# Altium PCB Acoustics_Preamp.PcbDoc
Units mil, origin at the board's own origin, x right, y up, seen from the top; angles counter-clockwise.
Board outline 550 x 1310 mil, 2 copper layers (Top Layer, Bottom Layer), stack 60.992 mil thick; 15 components, 9 nets, 40 pads, 28 vias.
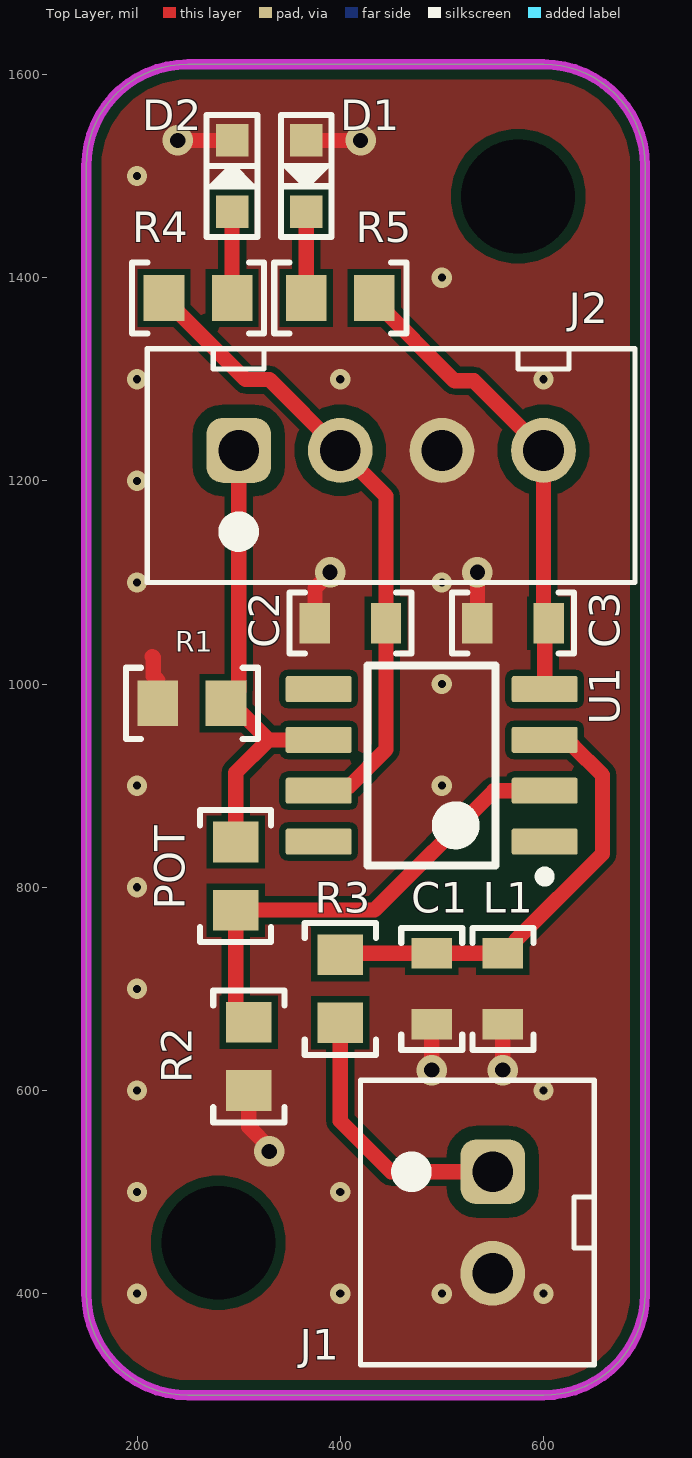
[diagram p0: Top Layer view]
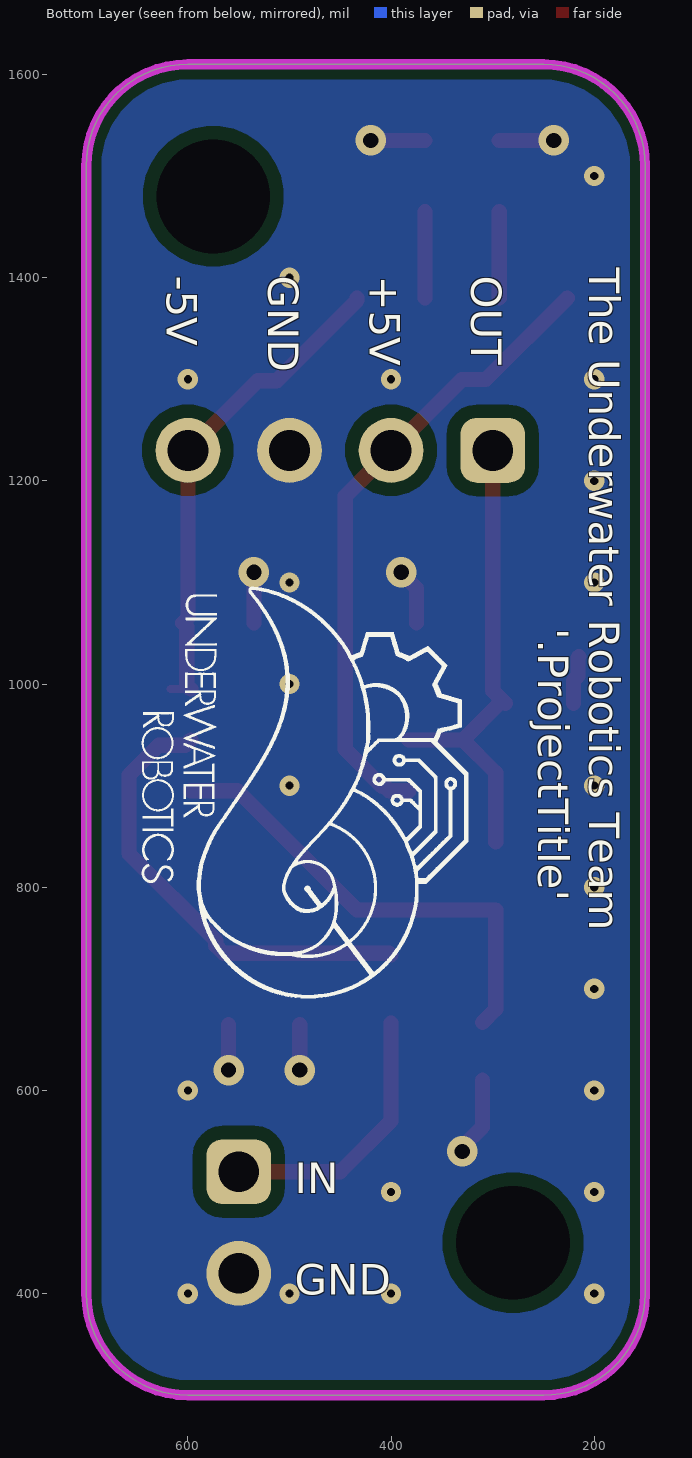
[diagram p1: Bottom Layer view, seen from below]
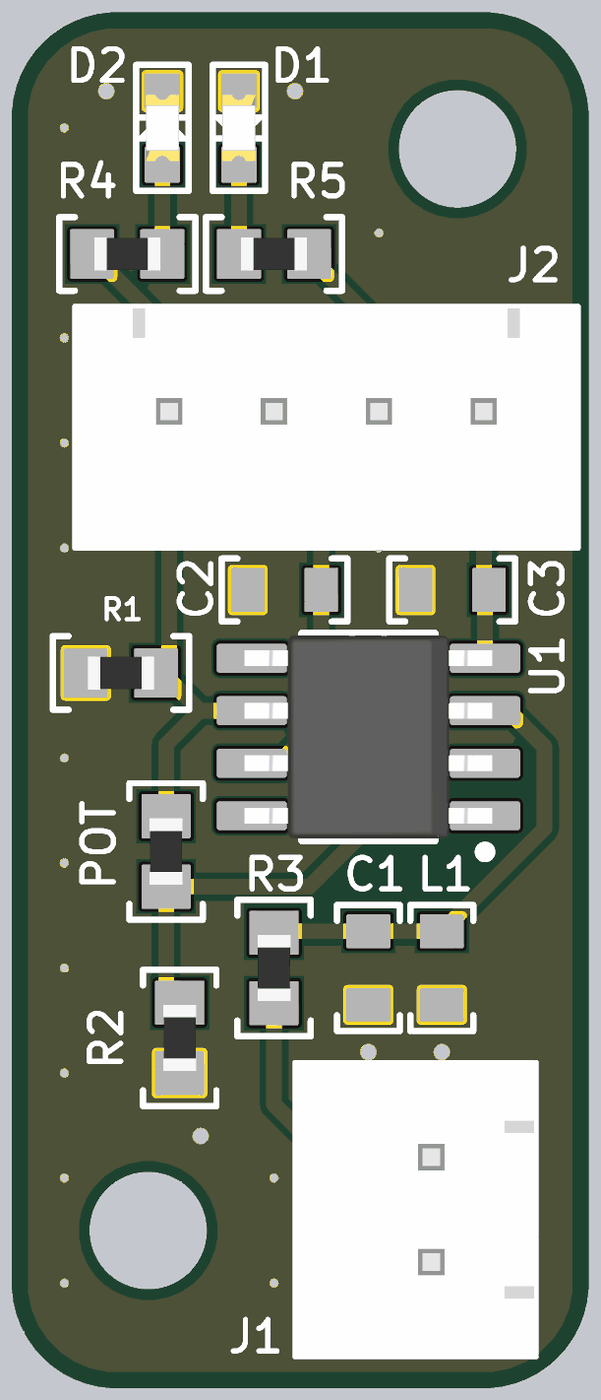
[diagram p2: 3D render of the assembled board from above, using the file's embedded part models]

## Layer stack, top to bottom
Top Solder: solder mask 1, SM-001, Dk 4
Top Layer: signal copper 1.378
Dielectric 3: core 58.236, Core-039, Dk 4.8
Bottom Layer: signal copper 1.378
Bottom Solder: solder mask 1, SM-001, Dk 4

## Board outline
150,400 150,1510 cw(c250,1510) 250,1610 600,1610 cw(c600,1510) 700,1510 700,400 cw(c600,400) 600,300 250,300 cw(c250,400)

## Design rules (kind name [scope] priority, off if disabled: settings)
AcuteAngle [All] p1: minimum=7.50000000000000E+0001 checktracksonly=FALSE
BoardOutlineClearance [(Not OnSilkscreen) Or (Not IsComponentPrimitive)] p1: gap=15 ignorepadtopadclearanceinfootprint=FALSE
Clearance "Clearance JLCPCB" [All] p1: gap=6 ignorepadtopadclearanceinfootprint=FALSE except(5: SMDPad-SMDPad; 10: Arc-Via Arc-Hole Track-Via Track-Hole Via-Via Via-Fill Via-Poly Via-Region Fill-Hole Poly-Hole Region-Hole; 13: Arc-THPad Track-THPad THPad-Fill THPad-Poly THPad-Region; 20: THPad-THPad)
ComponentOrientations [All] p1: allowedrotations=32
DiffPairsRouting CAN [All] p1: maxlimit=8 minlimit=8 mostfreqgap=8 toplayer_minwidth=8 toplayer_maxwidth=8 toplayer_prefwidth=8 bottomlayer_minwidth=8 bottomlayer_maxwidth=8 bottomlayer_prefwidth=8 impedanceprofiledriven=TRUE maxuncoupledlength=500
DiffPairsRouting "USB 2.0" [InDifferentialPairClass('USB 2.0')] p2: maxlimit=6 minlimit=6 mostfreqgap=6 toplayer_minwidth=15 toplayer_maxwidth=15 toplayer_prefwidth=15 bottomlayer_minwidth=15 bottomlayer_maxwidth=15 bottomlayer_prefwidth=15 maxuncoupledlength=500
DiffPairsRouting ETH [All] p3 off: maxlimit=4 minlimit=4 mostfreqgap=4 toplayer_minwidth=8 toplayer_maxwidth=8 toplayer_prefwidth=8 bottomlayer_minwidth=8 bottomlayer_maxwidth=8 bottomlayer_prefwidth=8 impedanceprofiledriven=TRUE maxuncoupledlength=500
FanoutControl Fanout_Default [All] p5: bgadir=Out bgaviamode=Centered fanoutstyle=Auto fanoutdirection=OutOnly viagrid=1 // Fanout_Default (Default Rule)
HoleSize "HoleSize JLCPCB" [All] p1: absolutevalues=TRUE maxlimit=245 minlimit=8 maxpercent=80.000 minpercent=20.000
HoleToHoleClearance "HoleToHoleClearance JLCPCB" [All] p1: gap=20 allowstackedmicrovias=TRUE
MinimumAnnularRing "MinimumAnnularRing JLCPCB" [All] p1: minimumring=6
MinimumSolderMaskSliver "MinimumSolderMaskSliver JLCPCB" [All] p1: minsoldermaskwidth=10
PasteMaskExpansion [All] p1: expansion=1
PolygonConnect [All] p1: connectstyle=Direct reliefconductorwidth=10 reliefentries=4 polygonreliefangle="90 Angle" airgapwidth=10
RoutingVias "RoutingVias JLCPCB" [All] p1: holewidth=10 width=22 viastyle="Through Hole" minholewidth=8 minwidth=20 maxholewidth=28 maxwidth=40
SMDToCorner [All] p1: distance=0
SMDToPlane [All] p1: distance=0
SilkToSilkClearance "SilkToSilkClearance JLCPCB" [All] p1: silktosilkclearance=3
SilkToSolderMaskClearance "SilkToSolderMaskClearance JLCPCB" [IsPad] p1: minsilkscreentomaskgap=6 clearancetoexposedcopper=TRUE
SolderMaskExpansion [All] p1: expansion=4 istentingtop=FALSE
SupplyNets "Schematic Supply Nets_2" [InNet('15V')] p1: voltage=0.000
SupplyNets "Schematic Supply Nets_1" [InNet('GND')] p2: voltage=0.000
SupplyNets "Schematic Supply Nets" [InNet('-15V')] p3: voltage=0.000
UnRoutedNet [All] p1: checkbadconnections=TRUE
Width "Width JLCPCB" [All] p1: maxlimit=100 minlimit=6 preferedwidth=10
21 further rules are at their usual default settings.

## Components (designator, comment, footprint, x,y, rotation, side; value= is the part's Value field where it differs from the comment)
C1 "22uF Ceramic" CAPACITOR_0603 490,700 r270 top value=2.2uF
C2 "100nF Ceramic 25V" CAPACITOR_0603 410,1060 r180 top value=0.1uF
C3 "100nF Ceramic 25V" CAPACITOR_0603 570,1060 r180 top value=0.1uF
D1 "150060GS75000" LED_0603 366.5,1500 r270 top
D2 "150060GS75000" LED_0603 293.5,1500 r90 top
J1 "XH2.54 VERT" CONN_JST_XH254_2POS_VERT 550,520 r270 top
J2 "XH2.54 VERT" CONN_JST_XH254_4POS_VERT 300,1230 r0 top
L1 "FIXED IND 12UH 10MA 1.8 OHM SMD" INDUCTOR_0603 560,700 r270 top value=12uH
POT "15k Ohm 5% 1/10W" RESISTOR_0603 297,811 r90 top
R1 "27 Ohm 5% 1/8W" RESISTOR_0603 254,981 r180 top
R2 "1k Ohm 5% 1/8W" RESISTOR_0603 310,633.5 r270 top
R3 "0.2 Ohm 5% 1/8W" RESISTOR_0603 400,700 r270 top
R4 "RC0603JR-1347KL" RESISTOR_0603 260,1380 r180 top
R5 "RC0603JR-1347KL" RESISTOR_0603 400,1380 r0 top
U1 "OPA228U" D0008A_M 490,920 r180 top

## Footprints (in the part's own frame and the unit in brackets; to place one, negate y for a bottom-side part, rotate by r counter-clockwise, add the part's x,y. Pads: shape width x height; smd on the part's side, far side on the other; paste and mask are expansions set on the pad)
CAPACITOR_0603 [mil] "CAPACITOR 0603"
  rect 30x40 smd: 1(-35,0) 2(35,0)
  silkscreen extent -60,-30 60,30, body extent -31,-16 32,16, height 31
CONN_JST_XH254_2POS_VERT [mm] "JST XH 2.54mm Pitch 2 Pos Vertical"
  rrect50% 1.62x1.62 hole 1.02: 1(0,0)
  round 1.62 hole 1.02: 2(2.54,0)
  silkscreen extent -2.29,-3.3 4.83,2.54, body extent -2.34,-3.35 4.88,2.49, height 7.21
CONN_JST_XH254_4POS_VERT [mm] "JST XH 2.54mm Pitch 4 Pos Vertical"
  rrect50% 1.62x1.62 hole 1.02: 1(0,0)
  round 1.62 hole 1.02: 2(2.54,0) 3(5.08,0) 4(7.62,0)
  silkscreen extent -2.29,-3.3 9.91,2.54, body extent -2.34,-3.35 9.96,2.49, height 7.21
D0008A_M [mm] "SOIC, 8-Leads, Body 5x4mm, Pitch 1.27mm, IPC Low Density"
  rrect15% 1.65x0.65 smd: 1(-2.825,1.905) 2(-2.825,0.635) 3(-2.825,-0.635) 4(-2.825,-1.905) 5(2.825,-1.905) 6(2.825,-0.635) 7(2.825,0.635) 8(2.825,1.905)
  silkscreen extent -2.95,-2.5 1.6,2.9, body extent -3,-2.45 3,2.45, height 1.63
INDUCTOR_0603 [mil] "INDUCTOR 0603"
  rect 30x40 smd: 1(-35,0) 2(35,0)
  silkscreen extent -60,-30 60,30, body extent -31,-16 32,16, height 31
LED_0603 [mil] "LED 0603"
  rect 32x32 smd: 1(-35,0) 2(35,0)
  silkscreen extent -60,-25 60,25, body extent -31,-16 32,16, height 28
RESISTOR_0603 [mil] "Resistor 0603"
  rect 40x45 smd: 1(-33.5,0) 2(33.5,0)
  silkscreen extent -65,-35 65,35, body extent -31,-16 32,16, height 16

## Part data
C1: library part CAPACITOR_22uF_0603, "CAP CER 2.2PF 50V C0G/NP0 0603", Supplier Part Number 1=445-8028-1-ND, Tolerance="+/- 20%", Voltage=6.3V, Made By="Flip B", Supplier 1=Digi-Key
C2 C3: library part CAPACITOR_0.1uF_0603_25V, "Cap 100nF 25V +/-10% / Ceramic 0603", Supplier Part Number 1=1276-1006-1-ND, Tolerance="+/- 10%", Voltage=6.3V, ComponentLink1Description=Datsheet, ComponentLink1URL=https://www.mouser.com/datasheet/2/212/KEM_C1002_X7R_SMD-1102033.pdf, Made By="Flip B", Supplier 1=Digikey
D1 D2: library part LED_Green_0603_3.2V, "LED Green Vf= 3.2V If = 0.025A / 150060GS75000", Color=Green, Forward Current=25mA, Forward Voltage=3.2V, Package=0603, Supplier Part Number 1=732-4971-1-ND, ComponentLink1Description=Datasheet, ComponentLink1URL=https://www.we-online.de/katalog/datasheet/150060GS75000.pdf, Made By="Flip B", Supplier 1=Digi-Key
J1: library part CONN_JST_XH254_2POS_VERT, "JST XH 2.54mm Pitch 2 Pos Vertical", Color=White, Current Per Pin=4A, Manufacturer=JST, ComponentLink1Description="Purchase Link", ComponentLink1URL=https://www.amazon.com/460PCS-XH2-54-Connector-Terminal-Connectors/dp/B09DBGVX5C, Configuration=Vertical, Created By="Robert P", NOTE="Do not use JST 2.5mm parts with this footprint. JST does not make 2.54mm pitch pins, rather only clones make this connector!", Number of Positions=2, Pitch=2.54mm, Series="XH 2.54"
J2: library part CONN_JST_XH254_4POS_VERT, "JST XH 2.54mm Pitch 4 Pos Vertical", Color=White, Current Per Pin=4A, Manufacturer=JST, ComponentLink1Description="Purchase Link", ComponentLink1URL=https://www.amazon.com/460PCS-XH2-54-Connector-Terminal-Connectors/dp/B09DBGVX5C, Configuration=Vertical, Created By="Robert P", NOTE="Do not use JST 2.5mm parts with this footprint. JST does not make 2.54mm pitch pins, rather only clones make this connector!", Number of Positions=4, Pitch=2.54mm, Series="XH 2.54"
L1: library part INDUCTOR_12uH_0603, "12 µH Shielded Multilayer Inductor 10 mA 1.8Ohm Max 0603 (1608 Metric)", Current Rating=2.1A, DC Resistance=36mOhm, Supplier Part Number 1=MLF1608E120JTD25, Tolerance="+/- 20%", Made By="Robert Pafford", Supplier 1="Arrow Electronics"
POT: library part RESISTOR_15K_0603, "RES 15k OHM 5% 1/10W 0603", Digikey Part Numer=CR0603-JW-104ELFTR-ND, Supplier Part Number 1=RMCF0603JG15K0, Tolerance="+/- 5%", Value  (Ohms)=15K, ComponentLink1Description=Datasheet, ComponentLink1URL=https://www.bourns.com/docs/product-datasheets/CRxxxxx.pdf, Made By="Dylan Trainor", Supplier=Digikey, Supplier 1=Avnet, Wattage=1/8W
R1: library part RESISTOR_27_0603, "RES 27 OHM 5% 1/8W 0603", Digikey Part Numer=CR0603-JW-104ELFTR-ND, Supplier Part Number 1=2019-RK73B1JTTD270JCT-ND, Tolerance="+/- 5%", Value  (Ohms)=27, ComponentLink1Description=Datasheet, ComponentLink1URL=https://www.bourns.com/docs/product-datasheets/CRxxxxx.pdf, Made By="Robert Pafford", Supplier=Digikey, Supplier 1=Digi-Key, Wattage=1/8W
R2: library part RESISTOR_1K_0603, "RES 1.8 OHM 5% 1/8W 0603", Digikey Part Numer=CR0603-JW-104ELFTR-ND, Supplier Part Number 1=2019-RK73B1JTTD102JCT-ND, Tolerance="+/- 5%", Value  (Ohms)=1K, ComponentLink1Description=Datasheet, ComponentLink1URL=https://www.bourns.com/docs/product-datasheets/CRxxxxx.pdf, Made By="Robert Pafford", Supplier=Digikey, Supplier 1=Digi-Key, Wattage=1/8W
R3: library part RESISTOR_0.2_0603, "RES 0.2 OHM 5% 1/8W 0603", Digikey Part Numer=CR0603-JW-104ELFTR-ND, Supplier Part Number 1=279-RLP73N1JR20JTD, Tolerance="+/- 5%", Value  (Ohms)=0.2, ComponentLink1Description=Datasheet, ComponentLink1URL=https://www.bourns.com/docs/product-datasheets/CRxxxxx.pdf, Made By="Robert Pafford", Supplier=Digikey, Supplier 1=Mouser, Wattage=1/8W
R4 R5: "47kohm 0603 1/10w", Mfr_Name=Yageo, Supplier Part Number 1=603-RC0603JR-1347KL, Copyright="Copyright (C) 2024 Ultra Librarian. All rights reserved.", Manufacturer_Part_Number=RC0603JR-1347KL, RefDes=RefDes, Supplier 1=Mouser, Type=DEV
U1: library part CMP-0272-00518-3, "High Precision, Low Noise Operational Amplifier, 5 to 36 V, -55 to 125 degC, 8-pin SOIC (D8), Green (RoHS & no Sb/Br)", Manufacturer="Texas Instruments", Rating=Catalog, Total Supply Voltage(Max)(+5V is 5, +/-5V is 10)=36, Total Supply Voltage(Min)(+5V is 5, +/-5V is 10)=5, CMRR(Min)(dB)=120, Code_JEDEC=MS-012, ComponentLink1Description="Manufacturer URL", ComponentLink1URL=http://www.ti.com/, ComponentLink2Description=Datasheet, ComponentLink2URL=http://www.ti.com/lit/ds/symlink/opa228.pdf, ComponentLink3Description="Package Specification", ComponentLink3URL=http://www.ti.com/litv/pdf/msoi002j, DatasheetVersion=SBOS110A, Eco-Plan="Green (RoHS & no Sb/Br)", GBW(Typ)(MHz)=33, IIB(Max)(pA)=10000, Iq per channel(Max)(mA)=3.8, Mounting Technology="Surface Mount", Number of Channels=1, Offset Drift(Typ)(uV/C)=0.1, PackageDescription="8-Pin Plastic Small Outline, Body 4.9 x 3.9 mm, Pitch 1.27 mm", PackageReference=D0008A, PackageVersion="4040047-3/M, 06/2011", Packing=TUBE, PartNumber=OPA228U, Slew Rate(Typ)(V/us)=11, Sub Family="High Supply Voltage Amplifier (>=30V), Low Noise Amp (<=10nV/rtHz), Low Offset Voltage Amplifier (<=500uV), Precision Amplifier", Vio (25C)(Max)(mV)=0.075

## Free pads (board coordinates)
  round 60 hole 112 unplated: 1(280,450) 1(575,1480)

## Via types
v1: diameter 20, hole 8, Top Layer to Bottom Layer, tented both sides, 21 vias
v2: diameter 30, hole 15, Top Layer to Bottom Layer, tented both sides, 7 vias

## Nets (pads, with @x,y where several pads share a name; then routed paths per layer and width w, separated by ;. In a path a pad name is that pad's centre, name@x,y a point inside that pad or via, vN(x,y) a via of type N, cw(c..) or ccw(c..) an arc to the next point about the centre after c; other vN are vias at no path point)
15V: C2.1 J2.2 R4.2 U1.7 | length 627.8
  Top Layer w15: R4.2 306.83,1299.67 330.33,1299.67 J2.2 445,1185 C2.1 445,935.51 408.8,899.31 406.09,899.31 401.78,895 U1.7@382.72,895
-15V: C3.1 J2.4 R5.2 U1.4 | length 490.3
  Top Layer w8: U1.4@597.28,995 U1.4@617.26,995
  Top Layer w15: R5.2 433.5,1377.5 512.58,1298.42 531.58,1298.42 J2.4 600,1065 C3.1 601.14,1056.14 601.14,998.86 U1.4@597.28,995
AMP_OUT: J2.1 POT.2 R1.1 U1.6 | length 468.6
  Top Layer w15: R1.1 300,993.5 J2.1 ; R1.1@296,978.31 329.31,945 ; POT.2 297,912.69 329.31,945 ; U1.6@382.72,945 U1.6 329.31,945
GND: C1.2 C2.2 C3.2 D1.1 D2.2 J1.2 J2.3 L1.2 R1.2 R2.2 | length 429.8
  Top Layer w15: 215,1027 215.96,1026.04 215.96,1008.04 220.5,1003.5 R1.2 ; v2(240,1535) D2.2 ; R2.2@310,610 310,564.06 330,544.06 v2(330,540) ; D1.1 v2(420,1535) ; C2.2 375,1094.28 390,1109.28 v2(390,1110) ; v2(490,620) C1.2 ; C3.2 v2(535,1110) ; v2(560,620) L1.2
  other v1: 200,400 400,400 500,400 600,400 200,500 400,500 200,600 600,600 200,700 200,800 200,900 500,900 500,1000 200,1100 500,1100 200,1200 200,1300 400,1300 600,1300 500,1400 200,1500
HYDRO_IN: J1.1 R3.2 | length 267.2
  Top Layer w15: R3.2 400,570 450,520 J1.1
NetC1_1: C1.1 L1.1 R3.1 U1.3 | length 454.6
  Top Layer w15: R3.1 401.5,735 565,735 572.5,742.5 572.5,747.5 658,833 658,910.45 628.75,939.7 602.58,939.7 U1.3@597.28,945
NetD1_2: D1.2 R5.1 | length 85
  Top Layer w15: R5.1 D1.2
NetD2_1: D2.1 R4.1 | length 85
  Top Layer w15: R4.1 D2.1
NetPOT_1: POT.1 R2.1 U1.2 | length 464.8
  Top Layer w15: R2.1 297,680 POT.1 433.64,777.5 551.14,895 U1.2@597.28,895
pads on no net: U1.1 U1.5 U1.8

## Polygon pours and split planes (outlines as drawn)
GND on Bottom Layer "GND_PLANE" (solid, pour order 0): 150,400 150,1510 cw(c250,1510) 250,1610 600,1610 cw(c600,1510) 700,1510 700,400 cw(c600,400) 600,300 250,300 cw(c250,400)
GND on Top Layer "GND_L01_P001" (solid, remove dead copper, pour order 1): 144.88,1610 700,1610 700,300 150,300

## Keep-outs
Keep-Out Layer:
  the board outline again, w10

## Silkscreen, mask and mechanical layers (free items; w line width, h text height)
Bottom Overlay:
  drawing of 19 lines, arcs and shapes, not listed
  text "The Underwater Robotics Team" at 205,1409.74 h30 r90
  text "OUT" at 320.99,1401.76 h30 r90
  text "+5V" at 420.99,1401.97 h30 r90
  text "GND" at 520.99,1401.76 h30 r90
  text "-5V" at 620.99,1401.97 h30 r90
  text "'.ProjectTitle'" at 255,1054.85 h30 r90
  text "IN" at 494.8,499 h30
  text "GND" at 495,399 h30
Mechanical 1:
  circle w10: c575,1480 r125
  circle w10: c280,450 r125